# EAGLE board PeripheralDriver (EAGLE 5.10)
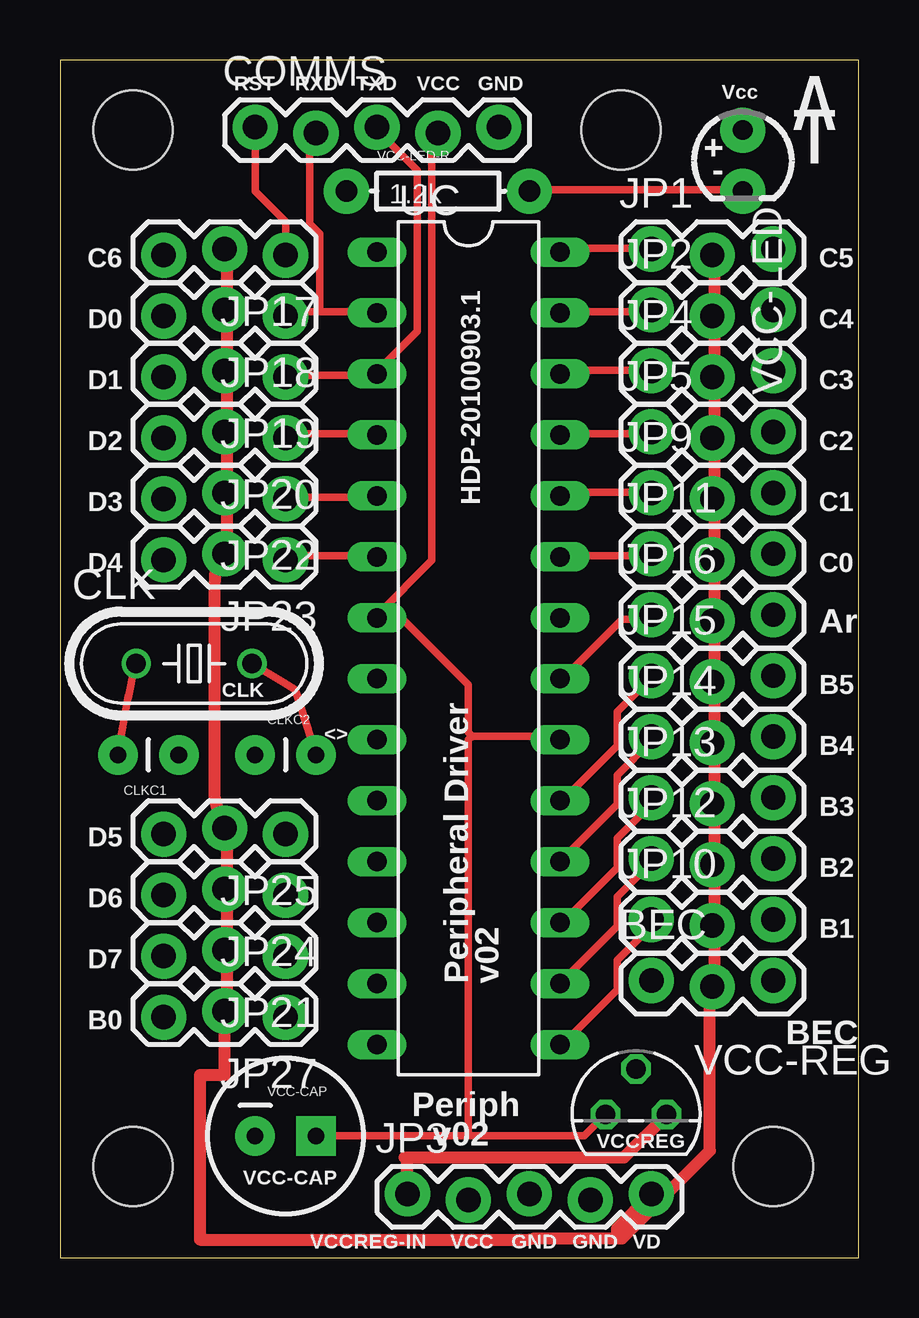
[diagram p0: board, top side]
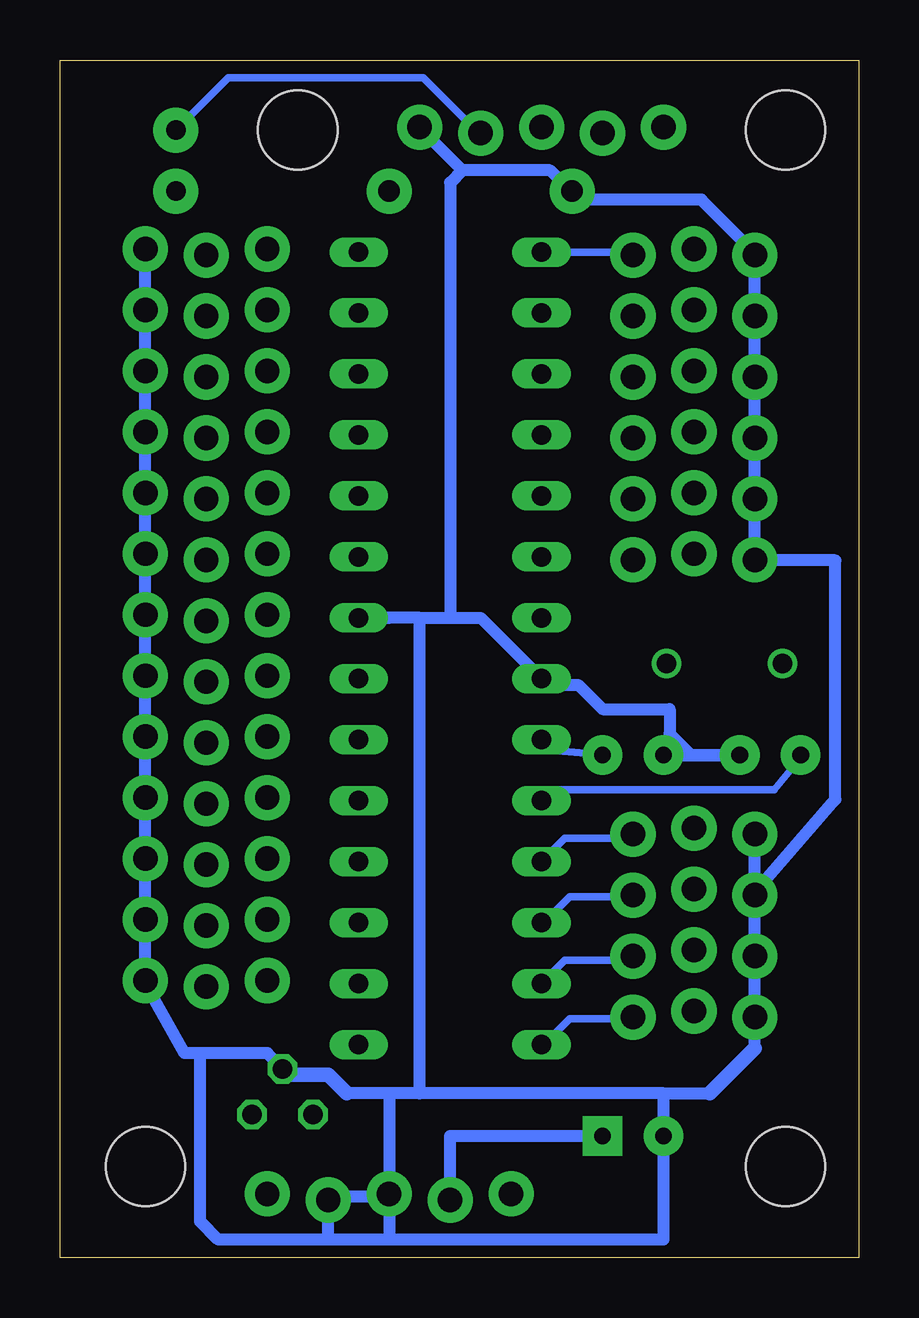
[diagram p1: board, bottom side, seen from below]

Size 33.27 x 49.91 mm. Coordinates in mm from the lower left corner, seen from the top.
Outline: 0,0 33.27,0 33.27,49.91 0,49.91 0,0
Copper layers (1*16): Top 0.0356mm / dielectric 1.5011mm / Bottom 0.0356mm
Design rules "LaenPCBOrder *": minimum track width 12mil, minimum drill 13mil, track to track 12mil, track to pad 12mil, pad to pad 12mil, via to via 12mil, smd to smd 6mil, copper to edge 15mil, drill to drill 6mil, minimum pad ring 7mil, minimum via ring 7mil, stop-mask expansion 4mil, vias tented up to drill 0mil, thermal gap 10mil
Net classes: 1 Power: width 0.508 mm

## Footprints (pad centres in the part's own frame; a part is rotated, then mirrored left to right if it is on the bottom)
1X03_LOCK = drill 1.016 pad 1.88 round: 1 0,0.127; 2 2.54,-0.127; 3 5.08,0.127
HC49/S = drill 0.813 round: 1 -2.413,0; 2 2.413,0
CAP-PTH-SMALL = drill 0.7 pad 1.651 round: 1 0,0; 2 2.54,0
1X05_LOCK = drill 1.016 pad 1.88 round: 1 0,0.127; 2 2.54,-0.127; 3 5.08,0.127; 4 7.62,-0.127; 5 10.16,0.127
STAND-OFF = hole 3.302: 0,0
DIL28-3 = drill 0.813 long: 1 -16.51,-3.81; 2 -13.97,-3.81; 3 -11.43,-3.81; 4 -8.89,-3.81; 5 -6.35,-3.81; 6 -3.81,-3.81; 7 -1.27,-3.81; 8 1.27,-3.81; 9 3.81,-3.81; 10 6.35,-3.81; 11 8.89,-3.81; 12 11.43,-3.81; 13 13.97,-3.81; 14 16.51,-3.81; 15 16.51,3.81; 16 13.97,3.81; 17 11.43,3.81; 18 8.89,3.81; 19 6.35,3.81; 20 3.81,3.81; 21 1.27,3.81; 22 -1.27,3.81; 23 -3.81,3.81; 24 -6.35,3.81; 25 -8.89,3.81; 26 -11.43,3.81; 27 -13.97,3.81; 28 -16.51,3.81
CPOL-RADIAL-100UF-25V = drill 0.7 pad 1.651 square: 1 1.27,0 | drill 0.7 pad 1.651 round: 2 -1.27,0
LED3MM = drill 0.813 pad 1.88 round: A -1.27,0; K 1.27,0
AXIAL-0.3 = drill 0.9 pad 1.88 round: P$1 -3.81,0; P$2 3.81,0
TO92 = drill 0.813 octagon: 1 -1.27,0; 2 0,1.905; 3 1.27,0

## Placement (x,y rotation side)
BEC  6V  [1X03_LOCK]  24.64,11.43 0 top
CLK  20MHz  [HC49/S]  5.59,24.77 0 top
CLKC1  18pF  [CAP-PTH-SMALL]  4.95,20.95 180 top
CLKC2  18pF  [CAP-PTH-SMALL]  8.13,20.95 0 top
COMMS  [1X05_LOCK]  8.13,46.99 0 top
JP1  [1X03_LOCK]  24.64,41.91 0 top
JP2  [1X03_LOCK]  24.64,39.37 0 top
JP3  [1X05_LOCK]  14.48,2.54 0 top
JP4  [1X03_LOCK]  24.64,36.83 0 top
JP5  [1X03_LOCK]  24.64,34.29 0 top
JP6  STAND-OFF  [STAND-OFF]  3.05,3.81 0 top
JP7  STAND-OFF  [STAND-OFF]  29.72,3.81 0 top
JP9  [1X03_LOCK]  24.64,31.75 0 top
JP10  [1X03_LOCK]  24.64,13.97 0 top
JP11  [1X03_LOCK]  24.64,29.21 0 top
JP12  [1X03_LOCK]  24.64,16.51 0 top
JP13  [1X03_LOCK]  24.64,19.05 0 top
JP14  [1X03_LOCK]  24.64,21.59 0 top
JP15  [1X03_LOCK]  24.64,24.13 0 top
JP16  [1X03_LOCK]  24.64,26.67 0 top
JP17  [1X03_LOCK]  9.4,41.91 180 top
JP18  [1X03_LOCK]  9.4,39.37 180 top
JP19  [1X03_LOCK]  9.4,36.83 180 top
JP20  [1X03_LOCK]  9.4,34.29 180 top
JP21  [1X03_LOCK]  9.4,12.7 180 top
JP22  [1X03_LOCK]  9.4,31.75 180 top
JP23  [1X03_LOCK]  9.4,29.21 180 top
JP24  [1X03_LOCK]  9.4,15.24 180 top
JP25  [1X03_LOCK]  9.4,17.78 180 top
JP27  [1X03_LOCK]  9.4,10.16 180 top
JP29  STAND-OFF  [STAND-OFF]  23.37,46.99 0 top
JP30  STAND-OFF  [STAND-OFF]  3.05,46.99 0 top
UC  ATmegaX8  [DIL28-3]  17.02,25.4 270 top
VCC-CAP  [CPOL-RADIAL-100UF-25V]  9.4,5.08 0 top
VCC-LED  3.8V  [LED3MM]  28.45,45.72 270 top
VCC-LED-R  1.2k  [AXIAL-0.3]  15.75,44.45 0 top
VCC-REG  78L05Z  [TO92]  24,5.97 0 top

## Library data of the parts
BEC CLKC1 CLKC2 COMMS JP1-JP7 JP9-JP25 JP27 JP29 JP30 VCC-CAP VCC-LED VCC-LED-R = SparkFun
CLK = crystal
UC = ic-package
VCC-REG = linear

## Nets
GND [Power]: BEC.3 CLKC1.1 CLKC2.1 COMMS.5 JP1.3 JP2.3 JP3.3 JP3.4 JP4.3 JP5.3 JP9.3 JP10.3 JP11.3 JP12.3 JP13.3 JP14.3 JP15.3 JP16.3 JP17.3 JP18.3 JP19.3 JP20.3 JP21.3 JP22.3 JP23.3 JP24.3 JP25.3 JP27.3 UC.8 UC.22 VCC-CAP.2 VCC-LED-R.P$1 VCC-REG.2
N$1: CLK.2 CLKC2.2 UC.9
N$2: JP22.1 UC.5
N$3: JP12.1 UC.16
N$4: JP10.1 UC.15
N$5: JP16.1 UC.21
N$6: JP15.1 UC.19
N$7: VCC-LED-R.P$2 VCC-LED.K
N$8: JP13.1 UC.17
N$9: JP11.1 UC.23
N$10: JP9.1 UC.24
N$11: JP5.1 UC.25
N$12: JP4.1 UC.26
N$14: JP27.1 UC.14
N$16: CLK.1 CLKC1.2 UC.10
N$17: JP2.1 UC.27
N$18: JP1.1 UC.28
N$19: JP20.1 UC.4
N$20: JP21.1 UC.13
N$21: JP24.1 UC.12
N$25: JP23.1 UC.6
N$26: JP25.1 UC.11
N$35: JP14.1 UC.18
RST: COMMS.1 JP17.1 UC.1
RXD: COMMS.2 JP18.1 UC.2
TXD: COMMS.3 JP19.1 UC.3
VCC: COMMS.4 JP3.2 UC.7 UC.20 VCC-CAP.1 VCC-LED.A VCC-REG.1
VD [Power]: BEC.2 JP1.2 JP2.2 JP3.5 JP4.2 JP5.2 JP9.2 JP10.2 JP11.2 JP12.2 JP13.2 JP14.2 JP15.2 JP16.2 JP17.2 JP18.2 JP19.2 JP20.2 JP21.2 JP22.2 JP23.2 JP24.2 JP25.2 JP27.2
VRIN: JP3.1 VCC-REG.3

## Tracks (layer width: path | path; a pad name or v marks a point on that pad's centre or on a via)
GND
  Bottom 0.508: VCC-REG.2 24.03,7.92 24.64,8.53 28.09,8.53 29.72,11.43 29.92,11.43 BEC.3 JP10.3 JP12.3 JP13.3 JP14.3 JP15.3 JP16.3 JP11.3 JP9.3 JP5.3 JP4.3 JP2.3 JP1.3 | 16.51,45.31 12.85,45.31 12.04,44.5 VCC-LED-R.P$1 11.84,44.3 11.63,44.09 6.55,44.09 4.32,41.86 JP17.3 JP18.3 JP19.3 JP20.3 JP22.3 JP23.3 4.32,29.06 | 16.51,45.31 18.14,46.94 COMMS.5 | 4.32,8.74 JP27.3 JP21.3 JP24.3 | 4.32,29.06 4.32,28.85 | CLKC2.1 7.37,20.93 4.52,20.93 CLKC1.1 6.99,20.95 7.87,21.84 7.87,22.86 10.67,22.86 11.68,23.88 12.95,23.88 UC.8 15.75,26.67 18.29,26.67 | JP24.3 JP25.3 | 4.32,29.06 0.96,29.06 0.96,19.1 4.32,15.24 JP24.3 | 17.02,26.67 17.02,44.81 16.51,45.31 | 18.29,26.67 UC.22 19.56,26.67 | 8.13,6.86 6.2,6.86 | 8.13,6.86 18.29,6.86 | 18.29,6.86 19.56,6.86 | 19.56,6.86 21.34,6.86 | 18.29,6.86 18.29,26.67 | 19.56,6.86 JP3.3 19.51,2.44 19.56,2.44 | 19.56,2.44 19.56,0.76 22.1,0.76 JP3.4 | 19.56,2.44 19.56,2.54 22.1,2.54 | VCC-CAP.2 8.13,0.76 26.67,0.76 27.43,1.52 27.43,8.38 | VCC-CAP.2 8.13,6.86 | VCC-CAP.2 8.18,5.08
  Bottom 0.61: 6.2,6.86 4.32,8.74 | 21.34,6.86 22.1,7.62 23.75,7.62 VCC-REG.2
N$1
  Top 0.305: CLK.2 9.3,23.98 9.8,23.67 CLKC2.2
  Bottom 0.305: UC.9 13.06,21.54 12.65,21.13 12.55,21.13 CLKC2.2
N$2
  Top 0.305: UC.5 13.06,31.7 9.4,31.7 JP22.1
N$3
  Top 0.305: 24.64,16.51 JP12.1 24.64,16.46 23.22,15.04 23.22,13.82 UC.16
N$4
  Top 0.305: 24.64,13.87 JP10.1 24.64,13.82 23.22,12.39 23.22,11.18 20.98,8.94 UC.15
N$5
  Top 0.305: UC.21 20.98,24.18 23.42,26.62 24.64,26.62 JP16.1
N$6
  Top 0.305: UC.19 20.98,19.1 23.22,21.34 23.22,22.76 24.64,24.18 JP15.1
N$7
  Top 0.305: VCC-LED-R.P$2 19.56,44.5 28.3,44.5 VCC-LED.K
N$8
  Top 0.305: 24.64,18.95 JP13.1 24.64,18.9 23.22,17.48 23.22,16.26 20.98,14.02 UC.17
N$9
  Top 0.305: UC.23 20.98,29.26 24.64,29.26 JP11.1
N$10
  Top 0.305: UC.24 20.98,31.9 24.64,31.9 JP9.1
N$11
  Top 0.305: UC.25 20.98,34.34 24.64,34.34 JP5.1
N$12
  Top 0.305: UC.26 20.98,36.98 24.64,36.98 JP4.1
N$14
  Bottom 0.305: UC.14 13.06,8.94 12.04,9.96 9.4,9.96 JP27.1
N$16
  Top 0.305: CLK.1 3.1,24.59 2.85,23.32 2.85,23.42 CLKC1.2
  Bottom 0.305: UC.10 13.06,19.1 12.65,19.51 3.5,19.51 2.34,20.93 CLKC1.2
N$17
  Top 0.305: UC.27 20.98,39.42 24.64,39.42 JP2.1
N$18
  Top 0.305: UC.28 20.98,42.06 24.64,42.06 JP1.1
N$19
  Top 0.305: UC.4 13.06,34.34 9.4,34.34 JP20.1
N$20
  Bottom 0.305: UC.13 12.24,12.39 9.4,12.39 JP21.1
N$21
  Bottom 0.305: UC.12 13.06,14.02 12.04,15.04 9.4,15.04 JP24.1
N$25
  Top 0.305: UC.6 13.06,29.26 9.4,29.26 JP23.1
N$26
  Bottom 0.305: UC.11 12.24,17.48 9.4,17.48 JP25.1
N$35
  Top 0.305: UC.18 23.22,18.9 23.22,20.12 24.64,21.54 JP14.1
RST
  Top 0.305: COMMS.1 8.13,44.45 9.4,43.18 JP17.1
  Bottom 0.305: UC.1 9.53,41.91 JP17.1
RXD
  Top 0.305: UC.2 13.06,39.42 10.82,39.42 | 10.82,39.42 10.82,42.67 10.41,43.08 10.41,46.53 10.62,46.74 COMMS.2 | 10.82,39.42 9.58,39.42 JP18.1
TXD
  Top 0.305: JP19.1 9.4,36.78 13.06,36.78 UC.3 13.26,36.98 14.88,38.61 14.88,45.31 13.26,46.94 COMMS.3
VCC
  Top 0.305: 22.61,5.89 VCC-REG.1 21.84,5.08 17.02,5.08 | COMMS.4 15.7,46.74 15.49,46.53 15.49,29.06 13.26,26.82 UC.7 14.22,26.67 17.02,23.88 17.02,21.89 17.17,21.74 | VCC-CAP.1 17.02,5.08 | 17.17,21.74 17.02,21.59 17.02,5.08 | 17.17,21.74 20.68,21.74 UC.20
  Bottom 0.305: COMMS.4 15.9,46.94 18.14,49.17 26.26,49.17 VCC-LED.A | JP3.2 17.12,2.44 17.02,2.54
  Bottom 0.508: 17.02,2.54 17.02,5.08 VCC-CAP.1
VD
  Top 0.508: JP1.2 27.28,41.66 27.28,39.42 JP2.2 27.28,39.01 27.28,36.78 JP4.2 27.28,36.58 27.28,34.34 JP5.2 27.28,33.93 27.28,31.7 JP9.2 27.28,31.5 27.28,29.26 JP11.2 27.28,28.85 27.28,26.67 JP16.2 27.28,26.47 27.28,24.23 JP15.2 27.28,23.82 27.28,21.59 JP14.2 27.28,21.39 27.28,19.15 JP13.2 27.28,18.75 27.28,16.51 JP12.2 27.28,16.31 27.28,14.07 JP10.2 27.28,13.66 27.28,11.43 BEC.2 27.08,11.23 27.08,4.47 23.42,0.81 23.22,0.81 | JP17.2 6.96,41.86 6.96,39.62 JP18.2 6.96,39.42 6.96,37.19 JP19.2 6.96,36.78 6.96,34.54 JP20.2 6.96,34.34 6.96,32.11 JP22.2 6.96,31.7 6.96,29.46 JP23.2 | JP24.2 6.96,15.24 6.96,13.01 JP21.2 6.96,12.6 6.96,10.36 | JP24.2 6.96,15.44 | 6.96,10.16 JP27.2 6.96,10.36 | JP23.2 6.76,29.26 | JP24.2 6.96,15.65 6.96,17.88 JP25.2 6.76,18.09 6.45,19.15 6.45,27.99 6.5,29.06 JP23.2 | 6.96,10.36 6.86,10.16 6.86,7.62 5.84,7.62 5.84,0.76 19.56,0.76 19.76,0.81 23.22,0.81 | JP3.5 24.64,2.64 23.22,1.22 23.22,0.81
VRIN
  Top 0.508: VCC-REG.3 23.5,4.19 14.35,4.19 14.48,4.06 JP3.1

## Text on the board
tPlace: RST | RXD | TXD | VCC | GND | Vcc | + | - | C6 | C5 | D0 | C4 | D1 | C3 | D2 | C2 | D3 | HDP-20100903.1 | C1 | D4 | C0 | Ar | CLK | B5 | <> | B4 | B3 | D5 | B2 | D6 | B1 | D7 | Peripheral Driver | v02 | B0 | BEC | Periph | v02 | VCCREG | VCC-CAP | C:/Users/marla/Desktop/AT/AV/2010-09-02 - logos/1.bmp | VCCREG-IN | VCC | GND | GND | VD